# Altium PCB Backplane_PCB_v1.PcbDoc
Units mm, origin at the board's own origin, x right, y up, seen from the top; angles counter-clockwise.
Board outline 92.34 x 177.99 mm, 4 copper layers (Top Layer, Signal Layer 1, Internal Plane 1, Bottom Layer), stack 0.778 mm thick; 50 components, 42 nets, 291 pads, 43 vias.
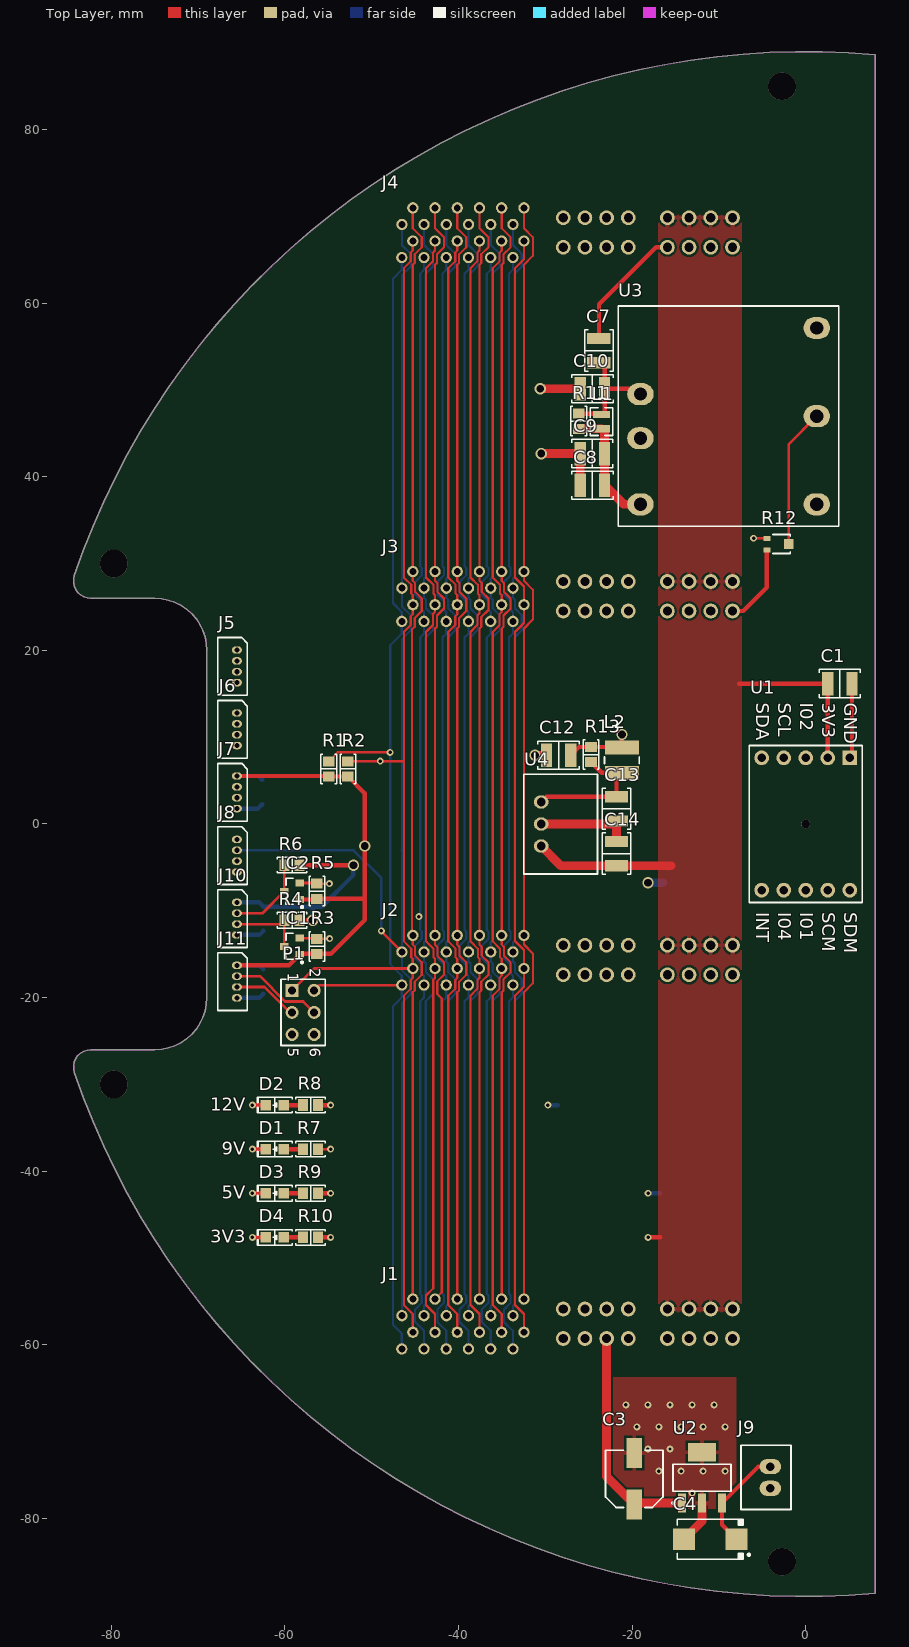
[diagram p0: Top Layer view]
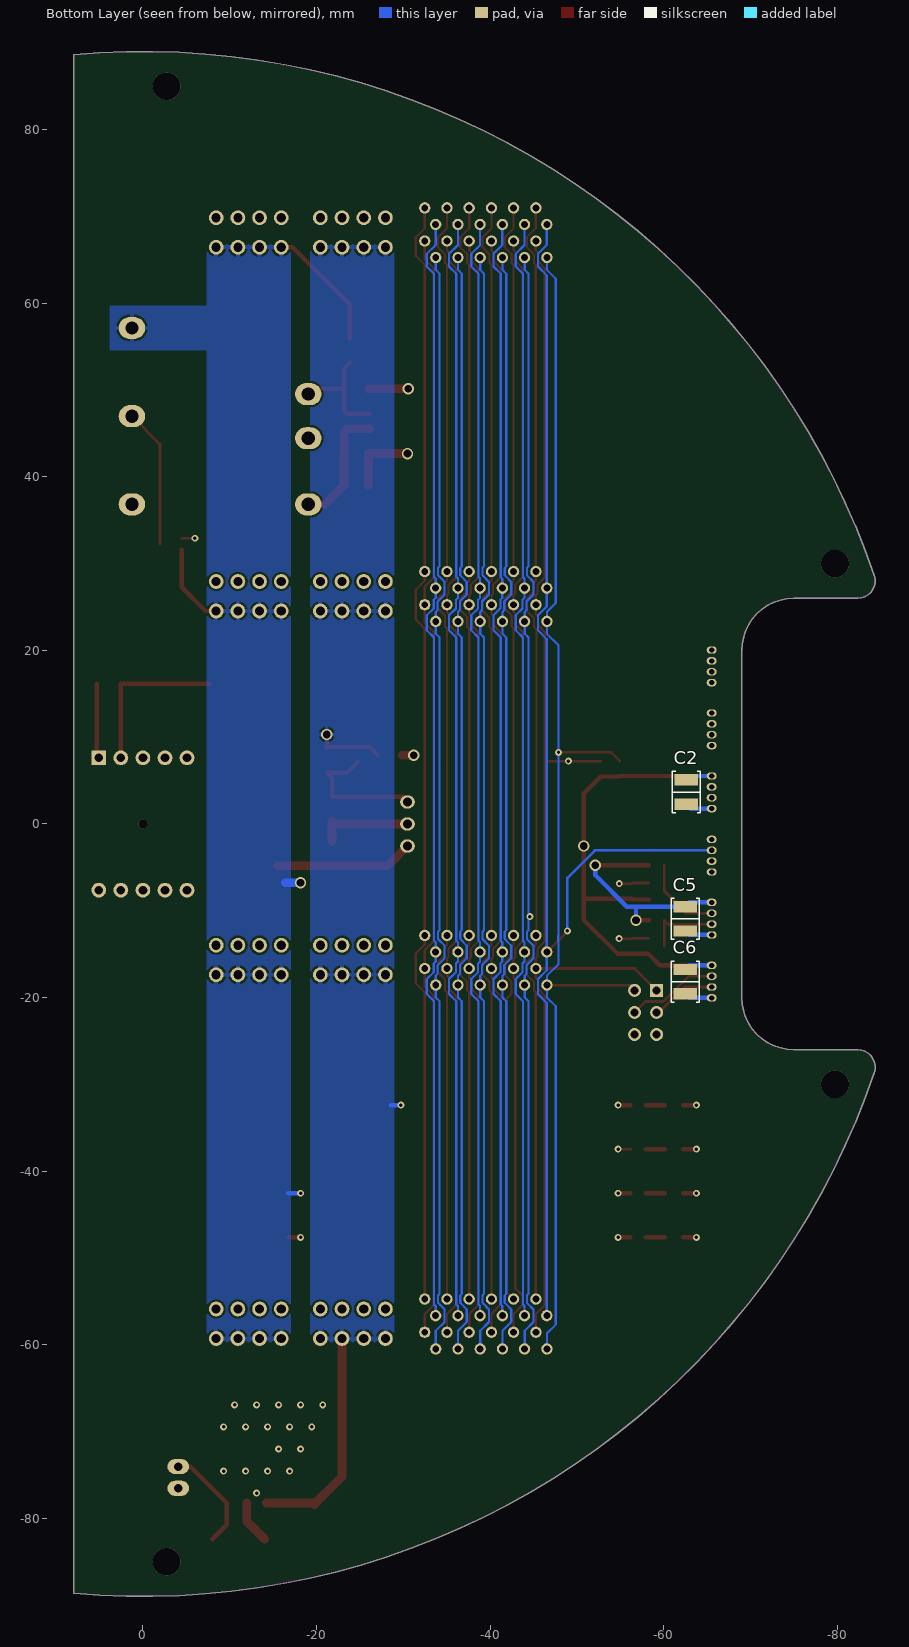
[diagram p1: Bottom Layer view, seen from below]
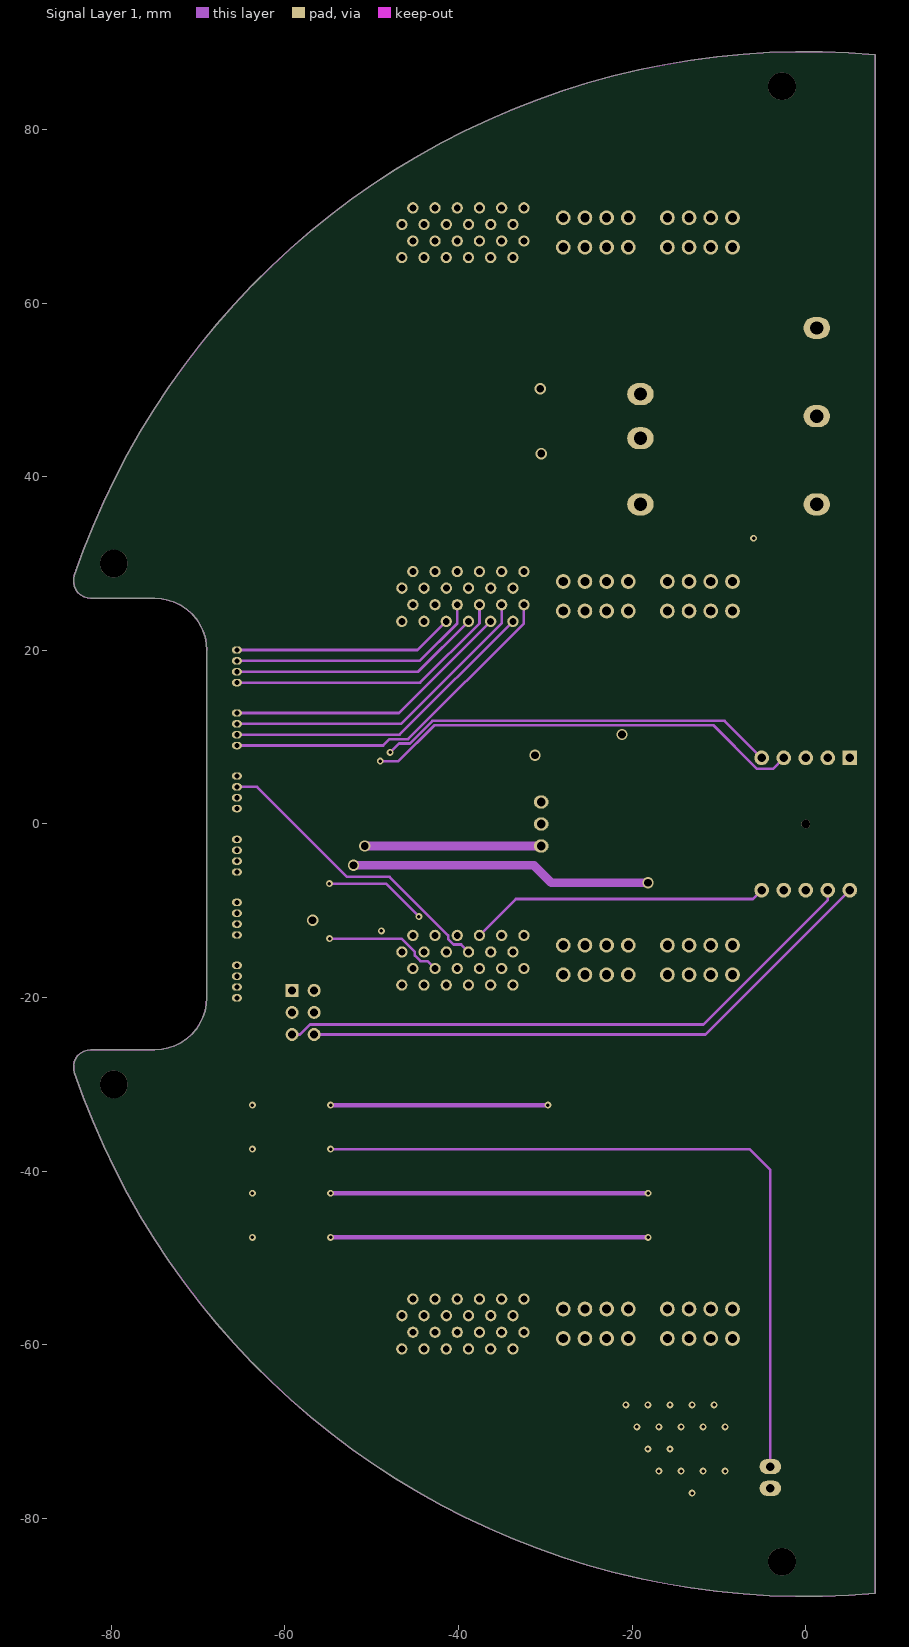
[diagram p2: Signal Layer 1]
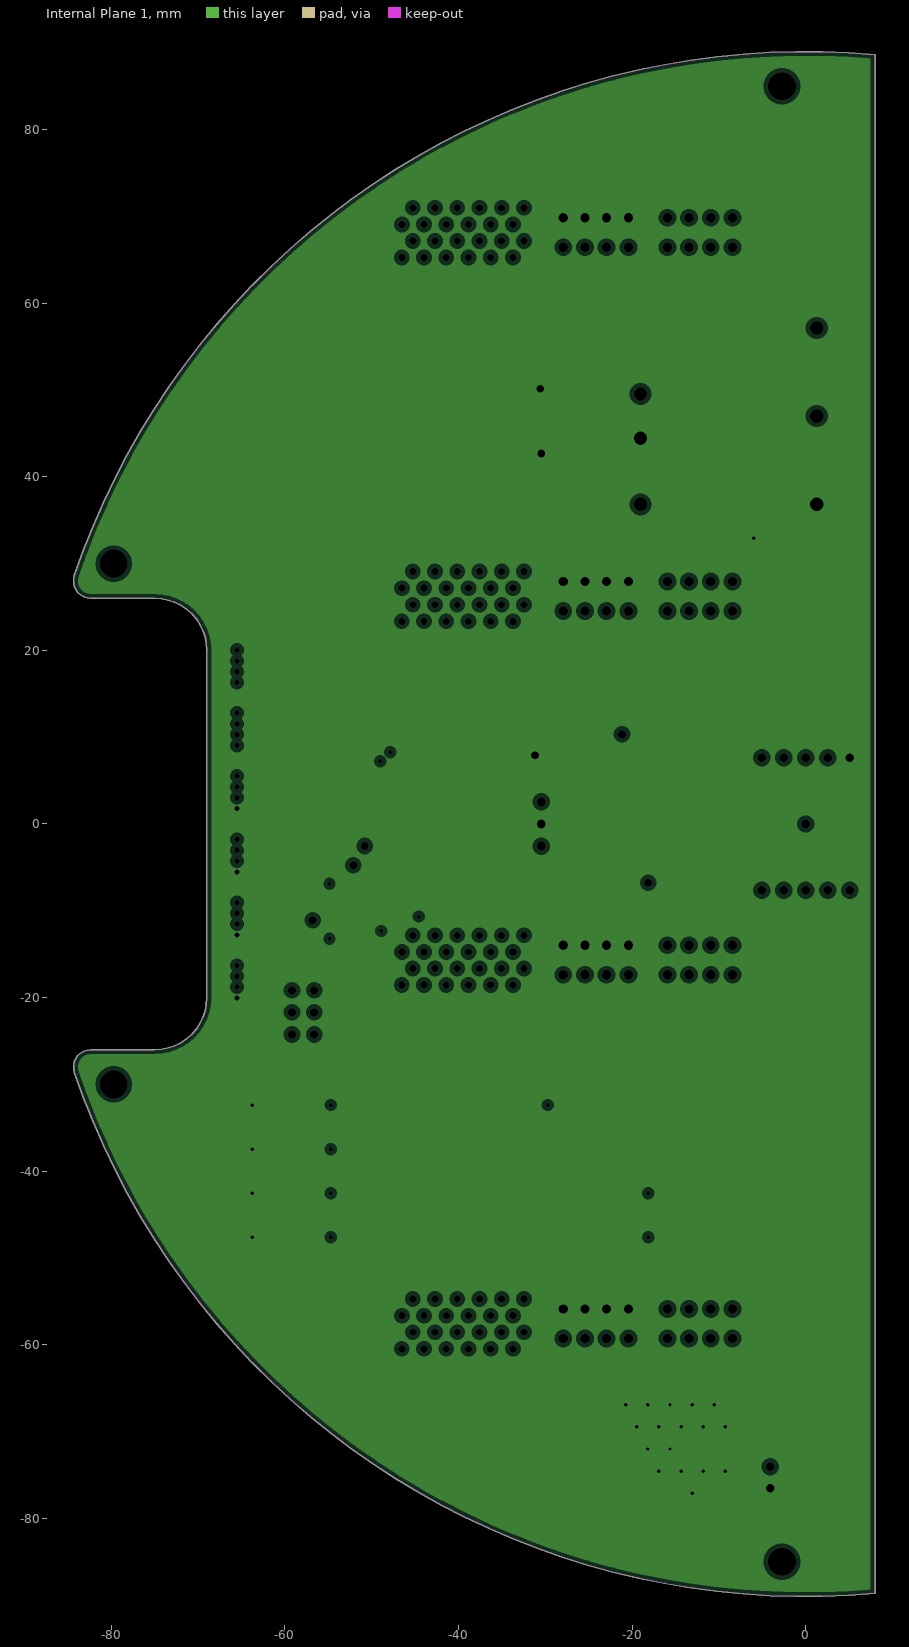
[diagram p3: Internal Plane 1, clearances drawn from the general rule]

## Layer stack, top to bottom
Top Solder: solder mask 0.0102, Solder Resist, Dk 3.5
Top Layer: signal copper 0.0356
Dielectric 1: core 0.254, FR-4, Dk 4.2
Signal Layer 1: signal copper 0.036
Dielectric 4: prepreg 0.127, Dk 4.2
Internal Plane 1: plane copper 0.036, net GND
Dielectric 3: core 0.254, Dk 4.2
Bottom Layer: signal copper 0.0356
Bottom Solder: solder mask 0.0102, Solder Resist, Dk 3.5

## Board outline
-84.256,28.644 -84.349,28.233 -84.354,27.812 -84.27,27.399 -84.102,27.013 -83.857,26.671 -83.545,26.387 -83.182,26.175 -82.781,26.044 -82.363,26 -74.992,26 -74.208,25.949 -73.439,25.796 -72.695,25.543 -71.992,25.196 -71.339,24.76 -70.749,24.243 -70.231,23.653 -69.795,23 -69.448,22.296 -69.196,21.553 -69.043,20.783 -68.992,20 -68.992,-20 -69.043,-20.783 -69.196,-21.553 -69.448,-22.296 -69.795,-23 -70.231,-23.653 -70.749,-24.243 -71.339,-24.76 -71.992,-25.196 -72.695,-25.543 -73.439,-25.796 -74.208,-25.949 -74.992,-26 -82.363,-26 -82.781,-26.044 -83.182,-26.175 -83.545,-26.387 -83.857,-26.671 -84.102,-27.013 -84.27,-27.399 -84.354,-27.812 -84.349,-28.233 -84.256,-28.644 -83.228,-31.506 -82.103,-34.332 -80.882,-37.118 -79.566,-39.86 -78.158,-42.556 -76.658,-45.202 -75.069,-47.796 -73.392,-50.333 -71.629,-52.812 -69.782,-55.229 -67.854,-57.581 -65.847,-59.867 -63.763,-62.082 -61.604,-64.225 -59.374,-66.293 -57.074,-68.283 -54.707,-70.194 -52.277,-72.023 -49.785,-73.767 -47.235,-75.426 -44.63,-76.996 -41.973,-78.476 -39.267,-79.865 -36.515,-81.16 -33.721,-82.361 -30.887,-83.465 -28.017,-84.472 -25.114,-85.381 -22.182,-86.189 -19.223,-86.897 -16.243,-87.504 -13.243,-88.008 -10.228,-88.409 -7.201,-88.707 -4.166,-88.902 -1.126,-88.993 1.916,-88.98 4.955,-88.862 7.989,-88.641 7.989,88.641 4.955,88.862 1.916,88.98 -1.126,88.993 -4.166,88.902 -7.201,88.707 -10.228,88.409 -13.243,88.008 -16.243,87.504 -19.223,86.897 -22.182,86.189 -25.114,85.381 -28.017,84.472 -30.887,83.465 -33.721,82.361 -36.515,81.16 -39.267,79.865 -41.973,78.476 -44.63,76.996 -47.235,75.426 -49.785,73.767 -52.277,72.023 -54.707,70.194 -57.074,68.283 -59.374,66.293 -61.604,64.225 -63.763,62.082 -65.847,59.867 -67.854,57.581 -69.782,55.229 -71.629,52.812 -73.392,50.333 -75.069,47.796 -76.658,45.202 -78.158,42.556 -79.566,39.86 -80.882,37.118 -82.103,34.332 -83.228,31.506

## Design rules (kind name [scope] priority, off if disabled: settings)
Clearance Clearance_Signal [All] p1: gap=0.254 ignorepadtopadclearanceinfootprint=FALSE except(0: Arc-Hole Track-Hole SMDPad-Hole THPad-Hole Via-Hole Fill-Hole Poly-Hole Region-Hole Text-Hole; 0.2: Arc-Arc Arc-Track Track-Track)
Clearance [All] p2: gap=0.254 ignorepadtopadclearanceinfootprint=FALSE except(0: Arc-Hole Track-Hole SMDPad-Hole THPad-Hole Via-Hole Fill-Hole Poly-Hole Region-Hole Text-Hole)
PlaneClearance [All] p1: clearance=0.508
PlaneConnect [All] p1: planeconnectstyle=Relief reliefexpansion=0.508 reliefentries=4 reliefconductorwidth=0.254 reliefairgap=0.254
PolygonConnect [All] p1: connectstyle=Relief reliefconductorwidth=0.508 reliefentries=4 polygonreliefangle="90 Angle" airgapwidth=0.254
RoutingVias RoutingVias_PWR [(InNet('3V3') OR InNet('5V') OR InNet('12V') OR InNet('GND'))] p1: holewidth=0.9 width=1.3 viastyle="Through Hole" minholewidth=0.4 minwidth=0.8 maxholewidth=1.4 maxwidth=2.1
RoutingVias RoutingVias_Signal [All] p2: holewidth=0.7 width=1.1 viastyle="Through Hole" minholewidth=0.4 minwidth=0.8 maxholewidth=1.3 maxwidth=1.8
SolderMaskExpansion [All] p1: expansion=0.102
Width Width_PWR [(InNet('3V3') OR InNet('5V') OR InNet('12V') OR InNet('GND'))] p1: maxlimit=1.016 minlimit=0.254 preferedwidth=0.508
Width [All] p2: maxlimit=0.508 minlimit=0.254 preferedwidth=0.305
28 further rules are at their usual default settings.

## Classes and differential pairs
component class "U_OPID[352] 3": C12 C13 C14 L2 R13 U4
component class "U_OPID[351] 5V Step-down regulator": C7 C8 C9 C10 L1 R11 R12 U3
component class Backplane: C1 C2 C3 C4 C5 C6 D1 D2 D3 D4 IC1 IC2 J1 J2 J3 J4 J5 J6 J7 J8 J9 J10 J11 P1 R1 R2 R3 R4 R5 R6 R7 R8 R9 R10 U1 U2

## Components (designator, comment, footprint, x,y, rotation, side; value= is the part's Value field where it differs from the comment)
C1 "10uF" "CAP 1210/3225 - 2.8MM" 3.934,16.178 r180 top
C2 "10uF" "CAP 1210/3225 - 2.8MM" -62.611,3.683 r90 bottom
C3 "22uF" "CAP ALUM 6.6MM" -19.757,-75.438 r90 top
C4 "22uF" "CAP POL 2917/7343" -11.002,-82.415 r180 top
C5 "10uF" "CAP 1210/3225 - 2.8MM" -62.484,-10.922 r90 bottom
C6 "10uF" "CAP 1210/3225 - 2.8MM" -62.484,-18.161 r90 bottom
C7 "1800 pF" CAP1210(3225) -23.823,54.541 r90 top
C8 "3.3uF" "CAP 1210/3225 - 2.0MM" -24.573,39.024 r0 top
C9 "3.3uF" "CAP 1210/3225 - 2.0MM" -24.592,42.678 r0 top
C10 "3.3uF" "CAP 1210/3225 - 2.0MM" -24.573,50.137 r0 top
C12 "10uF" "CAP 1210/3225 - 2.8MM" -28.475,7.919 r0 top
C13 "10uF" "CAP 1210/3225 - 2.8MM" -21.801,1.748 r90 top
C14 "10uF" "CAP 1210/3225 - 2.8MM" -21.801,-3.406 r270 top
D1 "White" "LED 0805/2012" -61.18,-37.465 r180 top value=Green
D2 "Red" "LED 0805/2012 RED" -61.18,-32.385 r180 top value=Green
D3 "Green" "LED 0805/2012 GREEN" -61.18,-42.545 r180 top
D4 "Yellow" "LED 0805/2012 YELLOW" -61.18,-47.625 r180 top value=Green
IC1 "BSS138NH6327XTSA2" "INFINEON SOT-23-3" -59.182,-14.097 r180 top
IC2 "BSS138NH6327XTSA2" "INFINEON SOT-23-3" -59.178,-7.747 r180 top
J1 "0461144241" LPH_VERT.RECEPT._ASSY_4PX24S -46.54,-60.47 r180 top
J2 "0461144241" LPH_VERT.RECEPT._ASSY_4PX24S -46.54,-18.56 r180 top
J3 "0461144241" LPH_VERT.RECEPT._ASSY_4PX24S -46.54,23.35 r180 top
J4 "0461144241" LPH_VERT.RECEPT._ASSY_4PX24S -46.54,65.26 r180 top
J5 "DF13-4P-1.25DSA" HDRV4W35P125_1X4_665X340X430P -65.532,20.041 r270 top
J6 "DF13-4P-1.25DSA" HDRV4W35P125_1X4_665X340X430P -65.532,12.787 r270 top
J7 "DF13-4P-1.25DSA" HDRV4W35P125_1X4_665X340X430P -65.532,5.528 r270 top
J8 "DF13-4P-1.25DSA" HDRV4W35P125_1X4_665X340X430P -65.532,-1.778 r270 top
J9 "B2B-XH-A(LF)(SN)" "JST XH B2B-XH-A" -4.073,-75.286 r270 top
J10 "DF13-4P-1.25DSA" HDRV4W35P125_1X4_665X340X430P -65.532,-9.032 r270 top
J11 "DF13-4P-1.25DSA" HDRV4W35P125_1X4_665X340X430P -65.532,-16.286 r270 top
L1 "1uH" "TDK VLS252012CX" -23.523,46.358 r90 top
L2 "VLCF4028T-330MR61-2" "TDK VLCF4028-2" -21.176,7.353 r270 top value=33uH
P1 "I2C Jumper" HDR2X3 -59.182,-19.169 r270 top
R1 "100k" "RES 0805/2012" -54.955,6.35 r270 top
R2 "100k" "RES 0805/2012" -52.75,6.35 r270 top
R3 "10k" "RES 0805/2012" -56.328,-14.097 r90 top
R4 "10k" "RES 0805/2012" -59.182,-11.093 r180 top
R5 "10k" "RES 0805/2012" -56.324,-7.747 r90 top
R6 "10k" "RES 0805/2012" -59.182,-4.743 r180 top
R7 "1.2k" "RES 0805/2012" -57.044,-37.465 r0 top
R8 "2.2k" "RES 0805/2012" -57.044,-32.385 r0 top
R9 "620" "RES 0805/2012" -57.044,-42.545 r0 top
R10 "240" "RES 0805/2012" -57.044,-47.625 r0 top
R11 "0.0" "RES 0805/2012" -26.153,46.408 r90 top
R12 "200k" "POT PANASONIC EVM2W" -3.175,32.257 r270 top
R13 "0.0" "RES 0805/2012" -24.73,7.994 r270 top
U1 "Ultimate Sensor Fusion Solution" "Ultimate Sensor Fusion Solution" 0,0 r270 top
U2 "LM2940IMP-9.0/NOPB" SOT230P700X180-4N -11.952,-75.311 r90 top
U3 "#NAME?" JSM2512S05 -8.89,46.99 r270 top
U4 "#NAME?" R-78Exx-1.0 -30.48,2.54 r270 top

## Footprints (in the part's own frame and the unit in brackets; to place one, negate y for a bottom-side part, rotate by r counter-clockwise, add the part's x,y. Pads: shape width x height; smd on the part's side, far side on the other; paste and mask are expansions set on the pad)
CAP1210(3225) [mm] "Chip Capacitor, 2-Leads, Body 3.20x2.50mm, IPC Medium Density"
  rect 1.3x2.7 smd: 1(-1.4,0) 2(1.4,0)
  silkscreen extent -2.38,-1.62 2.37,1.62, body extent -1.6,-1.25 1.6,1.25, height 1.8
"CAP 1210/3225 - 2.0MM" [mm] "Chip Capacitor, 2-Leads, Body 3.20x2.50mm, IPC Medium Density"
  rect 1.3x2.7 smd: 1(-1.4,0) 2(1.4,0)
  silkscreen extent -2.38,-1.63 2.37,1.63, body extent -1.6,-1.25 1.6,1.25, height 2
"CAP 1210/3225 - 2.8MM" [mm] "Chip Capacitor, 2-Leads, Body 3.20x2.50mm, IPC Medium Density"
  rect 1.3x2.7 smd: 1(-1.4,0) 2(1.4,0)
  silkscreen extent -2.38,-1.62 2.38,1.62, body extent -1.6,-1.25 1.6,1.25, height 2.8
"CAP ALUM 6.6MM" [mm] "Aluminum Electrolytic Capacitor, Body 6.60x6.60x7.70mm, IPC Low Density"
  rect 3.45x1.8 smd: 1(-2.95,0) 2(2.95,0)
  silkscreen extent -3.3,-3.3 3.3,3.3, body extent -3.5,-3.3 3.5,3.3, height 7.7
"CAP POL 2917/7343" [mm] "Molded Capacitor, 2-Leads, Body 7.30x4.30mm, IPC Medium Density"
  rect 2.55x2.45 smd: 1(-3.025,0) 2(3.025,0)
  silkscreen extent -4.58,-2.3 3.8,2.3, body extent -3.65,-2.15 3.65,2.15, height 4.1
HDR2X3 [mm] "Connector; Header; 3x2 Position"
  rect 1.5x1.5 hole 0.9: 1(0,0)
  round 1.5 hole 0.9: 2(0,2.54) 3(2.54,0) 4(2.54,2.54) 5(5.08,0) 6(5.08,2.54)
  silkscreen extent -1.27,-1.27 6.35,3.81
HDRV4W35P125_1X4_665X340X430P [mm]
  oval 0.85x1.15 hole 0.6 unplated: 1(0,0) 2(1.25,0) 3(2.5,0) 4(3.75,0)
  silkscreen extent -1.45,-2.2 5.2,1.2, body extent -1.45,-2.2 5.2,1.2, height 4.3
"INFINEON SOT-23-3" [mm] "SOT23, 3-Leads, Body 2.90x2.40mm, Pitch 0.95mm, IPC Medium Density"
  rect 0.972x0.802 smd: 1(-0.885,0.95) 2(0.885,0) 3(-0.885,-0.95)
  silkscreen extent -1.28,-1.5 0.7,1.95, body extent -1.16,-1.45 1.16,1.45, height 1
JSM2512S05 [mil]
  oval 100x120 hole 60: 1(-100,-400) 2(100,-400) 3(-400,400) 4(0,400) 5(400,400) 6(400,-400)
  silkscreen extent -500,-500 500,500, body extent -500,-500 500,500, height 400
"JST XH B2B-XH-A" [mm]
  oval 1.75x2.5 hole 1: 1(-1.25,0) 2(1.25,0)
  silkscreen extent -3.7,-3.38 3.7,2.38, body extent -3.7,-3.38 3.7,2.38, height 7
"LED 0805/2012" [mm] "Chip Diode, 2-Leads, Body 2.00x1.25mm, IPC Medium Density"
  rect 1.2x1.2 smd: 1(-1.05,0) 2(1.05,0)
  silkscreen extent -2.03,-0.9 2.03,0.9, body extent -1,-0.62 1,0.63, height 0.9
"LED 0805/2012 GREEN" [mm] "Chip Diode, 2-Leads, Body 2.00x1.25mm, IPC Medium Density"
  rect 1.2x1.2 smd: 1(-1.05,0) 2(1.05,0)
  silkscreen extent -2.03,-0.9 2.03,0.9, body extent -1,-0.62 1,0.63, height 0.9
"LED 0805/2012 RED" [mm] "Chip Diode, 2-Leads, Body 2.00x1.25mm, IPC Medium Density"
  rect 1.2x1.2 smd: 1(-1.05,0) 2(1.05,0)
  silkscreen extent -2.03,-0.9 2.03,0.9, body extent -1,-0.62 1,0.63, height 0.9
"LED 0805/2012 YELLOW" [mm] "Chip Diode, 2-Leads, Body 2.00x1.25mm, IPC Medium Density"
  rect 1.2x1.2 smd: 1(-1.05,0) 2(1.05,0)
  silkscreen extent -2.03,-0.9 2.03,0.9, body extent -1,-0.62 1,0.63, height 0.9
LPH_VERT.RECEPT._ASSY_4PX24S [mm]
  round 1.3 hole 0.8 unplated: 1(0,0) 2(-1.27,-1.91) 3(-2.56,0) 4(-3.83,-1.91) 5(-5.12,0) 6(-6.39,-1.91) 7(-7.68,0) 8(-8.95,-1.91) 9(-10.24,0) 10(-11.51,-1.91) 11(-12.8,0) 12(-14.07,-1.91) 13(-0.01,-3.82) 14(-1.27,-5.73) 15(-2.57,-3.82) 16(-3.83,-5.73) 17(-5.13,-3.82) 18(-6.39,-5.73) 19(-7.69,-3.82) 20(-8.95,-5.73) 21(-10.25,-3.82) 22(-11.51,-5.73) 23(-12.81,-3.82) 24(-14.07,-5.73)
  round 1.7 hole 1.05 unplated: P1A(-26.1,-1.19) P1A(-23.6,-1.19) P1A(-21.1,-1.19) P1A(-18.6,-1.19) P1B(-26.1,-4.59) P1B(-23.6,-4.59) P1B(-21.1,-4.59) P1B(-18.6,-4.59) P2A(-38.1,-1.19) P2A(-35.6,-1.19) P2A(-33.1,-1.19) P2A(-30.6,-1.19) P2B(-38.1,-4.59) P2B(-35.6,-4.59) P2B(-33.1,-4.59) P2B(-30.6,-4.59)
  body extent -40.54,-7.03 2.42,1.3, height 15.22
"POT PANASONIC EVM2W" [mm] "Panasonic EVM2W 2.75mm x 2.20mm x 1.05mm"
  rect 0.575x0.8 smd: 1(-0.663,-1.3) 3(0.662,-1.3)
  rect 1.2x1.1 smd: 2(0,1.2)
  silkscreen extent -1.1,-0.6 1.1,1.4, body extent -1.1,-1.3 1.1,1.45, height 0.81
R-78Exx-1.0 [mm]
  oval 1.5x1.7 hole 1: 1(0,0) 2(2.54,0) 3(5.08,0)
  silkscreen extent -3.2,-2 8.3,6.5, body extent -3.3,-1.95 8.3,6.55, height 10.4
"RES 0805/2012" [mm] "Chip Resistor, 2-Leads, Body 2.00x1.25mm, IPC Medium Density"
  rect 1.15x1.35 smd: 1(-0.875,0) 2(0.875,0)
  silkscreen extent -1.7,-0.9 1.7,0.9, body extent -0.95,-0.62 1.05,0.63, height 0.6
SOT230P700X180-4N [mm] "SOT223, 4-Leads, Body 6,50x7,00mm (avg), Pitch 2,30mm, IPC Medium Density"
  rect 2.15x0.9 smd: 1(-2.925,2.3) 2(-2.925,0) 3(-2.925,-2.3)
  rect 2.15x3.2 smd: 4(2.925,0)
  silkscreen extent -3.05,-3.35 1.55,3.42, body extent -3.5,-3.35 3.5,3.35, height 1.8
"TDK VLCF4028-2" [mm] "Precision Wire Wound Inductor, 2-Leads, Body 4.00x4.00mm, IPC Medium Density"
  rect 1.6x3.9 smd: 1(-1.45,0) 2(1.45,0)
  silkscreen extent -0.4,-2 0.4,2, body extent -2.05,-2 2.05,2, height 2.81
"TDK VLS252012CX" [mm] "Inductor, 2-Leads, Body 2.50x2.00mm, IPC Medium Density"
  rect 0.85x2 smd: 1(-0.825,0) 2(0.825,0)
  silkscreen extent -1.6,-1.3 1.6,1.3, body extent -1.25,-1 1.25,1, height 1.2
"Ultimate Sensor Fusion Solution" [mm]
  rect 1.7x1.7 hole 1: 1(-7.62,5.08)
  round 1.7 hole 1: 2(-7.62,2.54) 3(-7.62,0) 4(-7.62,-2.54) 5(-7.62,-5.08) 6(7.62,-5.08) 7(7.62,-2.54) 8(7.62,0) 9(7.62,2.54) 10(7.62,5.08)
  silkscreen extent -9.05,-6.5 9.05,6.5, body extent -8.89,-6.35 8.89,6.35, height 8.52

## Part data
C1 C2 C5 C6 C12 C13 C14: library part C3225X7S1H106M250AB, "CAP CER 10UF 50V X7S 1210", Device Package="1210 (3225 Metric)", Manufacturer="TDK Corporation", Supplier Part Number 1=445-4537-2-ND, TemperatureCoefficient=X7S, TemperatureRange="-55C ~ 125C", Tolerance=20%, Voltage=50V, ComponentLink1Description=Datasheet, ComponentLink1URL=https://product.tdk.com/info/en/catalog/datasheets/mlcc_commercial_general_en.pdf, ComponentLink2Description="Digi-Key Listing", ComponentLink2URL=https://www.digikey.com/product-detail/en/tdk-corporation/C3225X7S1H106M250AB/445-4537-2-ND/2042208, PartId=19089, Part Number=C3225X7S1H106M250AB, Price=0,3578, Supplier 1=Digi-Key
C3: library part UWJ1V220MCL1GB, "CAP ALUM 22UF 20% 35V SMD", Device Package="Radial, Can - SMD", Lifetime @ Temp="2000 Hrs @ 85C", Manufacturer=Nichicon, Ripple Current=45mA, Supplier Part Number 1=493-9805-2-ND, TemperatureRange="-40C ~ 85C", Tolerance=20%, Voltage=35V, ComponentLink1Description=Datasheet, ComponentLink1URL=http://nichicon-us.com/english/products/pdfs/e-wj.pdf, ComponentLink2Description="Digi-Key listing", ComponentLink2URL=http://digikey.com/product-detail/en/UWJ1V220MCL1GB/493-9805-2-ND/2550774, Impedance=-, PartId=7192, Part Number=UWJ1V220MCL1GB, Price=0,1009, Supplier 1=Digi-Key, Type="General Purpose"
C4: library part 293D226X0020D2TE3, "CAP TANT 22UF 20V 20% 2917", Device Package="2917 (7343 Metric)", Manufacturer="Vishay Sprague", Supplier Part Number 1=718-1063-2-ND, TemperatureRange="-55C ~ 125C", Tolerance=20%, Voltage=20V, ComponentLink1Description=Datasheet, ComponentLink1URL=http://www.vishay.com/docs/40002/293d.pdf, ComponentLink2Description="Digi-Key listing", ComponentLink2URL=http://digikey.com/product-detail/en/293D226X0020D2TE3/718-1063-2-ND/1559415, PartId=6865, Part Number=293D226X0020D2TE3, Price=0,3306, Supplier 1=Digi-Key, Type="General Purpose"
C7: library part C1210C182JGRACTU, Supplier Part Number 1=399-4821-1-ND, Tolerance="± 5%", Voltage Rating="2 kV", ComponentLink1Description="Manufacturer Link", ComponentLink1URL=http://www.kemet.com/, ComponentLink2Description=Datasheet, ComponentLink2URL=https://content.kemet.com/datasheets/KEM_C1010_X7R_HV_SMD.pdf, Part Number=C1210C182JGRACTU, Supplier 1=Digi-Key
C8 C9 C10: library part C1210C335K3NACTU, "CAP CER 3.3UF 25V X8L 1210", Device Package="1210 (3225 Metric)", Manufacturer=Kemet, Supplier Part Number 1=399-5739-2-ND, TemperatureCoefficient=X8L, TemperatureRange="-55C ~ 150C", Tolerance=10%, Voltage=25V, ComponentLink1Description=Datasheet, ComponentLink1URL=http://www.kemet.com/Lists/ProductCatalog/Attachments/71/KEM_C1008_X8L_150C_SMD.pdf, ComponentLink2Description="Digi-Key Listing", ComponentLink2URL=https://www.digikey.com/product-detail/en/kemet/C1210C335K3NACTU/399-5739-2-ND/2209335, PartId=18606, Part Number=C1210C335K3NACTU, Price=0,2645, Supplier 1=Digi-Key
D1: library part VAOL-S8WR4, "LED WHITE DIFFUSED 0805 SMD", Current (Test)=5mA, Device Package="0805 (2012 Metric)", Manufacturer="Visual Communications Company - VCC", Supplier Part Number 1=VAOL-S8WR4TR-ND, Voltage Forward=3V, Colour=White, ComponentLink1Description=Datasheet, ComponentLink1URL=http://vcclite.com/_pdf/VAOL-S8WR4-LED-0805-white.pdf, ComponentLink2Description="Digi-Key Listing", ComponentLink2URL=http://www.digikey.ca/product-detail/en/VAOL-S8WR4/VAOL-S8WR4TR-ND/4515729, Lens Transparency=Diffused, Millicandela=50mcd, PartId=7086, Part Number=VAOL-S8WR4, Price=0,2614, Supplier 1=Digi-Key, Type="Surface Mount", Viewing Angle=150
D2: library part "LH R974-LP-1", "LED RED DIFFUSED 0805 SMD", Current (Test)=20mA, Device Package="0805 (2012 Metric)", Manufacturer="OSRAM Opto Semiconductors Inc.", Supplier Part Number 1=475-1415-2-ND, Voltage Forward=1.8V, Colour=Red, ComponentLink1Description=Datasheet, ComponentLink1URL=http://www.osram-os.com/Graphics/XPic8/00078869_0.pdf, ComponentLink2Description="Digi-Key Listing", ComponentLink2URL=http://www.digikey.ca/product-detail/en/LH%20R974-LP-1/475-1415-2-ND/1227932, Lens Transparency=Diffused, Millicandela=41mcd, PartId=7077, Part Number="LH R974-LP-1", Price=0,0621, Supplier 1=Digi-Key, Type="Surface Mount", Viewing Angle=160
D3: library part "LG R971-KN-1", "LED GREEN DIFFUSED 0805 SMD", Current (Test)=20mA, Device Package="0805 (2012 Metric)", Manufacturer="OSRAM Opto Semiconductors Inc.", Supplier Part Number 1=475-1410-2-ND, Voltage Forward=2.2V, Colour=Green, ComponentLink1Description=Datasheet, ComponentLink1URL=http://www.osram-os.com/Graphics/XPic9/00078860_0.pdf, ComponentLink2Description="Digi-Key Listing", ComponentLink2URL=http://www.digikey.ca/product-detail/en/LG%20R971-KN-1/475-1410-2-ND/1227925, Lens Transparency=Diffused, Millicandela=26.05mcd, PartId=7076, Part Number="LG R971-KN-1", Price=0,0621, Supplier 1=Digi-Key, Type="Surface Mount", Viewing Angle=160
D4: library part "LY R976-PS-36", "LED YELLOW DIFFUSED 0805 SMD", Current (Test)=20mA, Device Package="0805 (2012 Metric)", Manufacturer="OSRAM Opto Semiconductors Inc.", Supplier Part Number 1=475-2560-2-ND, Voltage Forward=2V, Colour=Yellow, ComponentLink1Description=Datasheet, ComponentLink1URL=http://www.osram-os.com/Graphics/XPic9/00078941_0.pdf, ComponentLink2Description="Digi-Key Listing", ComponentLink2URL=http://www.digikey.ca/product-detail/en/LY%20R976-PS-36/475-2560-2-ND/1228052, Lens Transparency=Diffused, Millicandela=162.5mcd, PartId=7082, Part Number="LY R976-PS-36", Price=0,0654, Supplier 1=Digi-Key, Type="Surface Mount", Viewing Angle=160
IC1 IC2: "MOSFET N-CH 60V 230MA SOT-23", Current Continuous Drain="230mA (Ta)", Device Package="TO-236-3, SC-59, SOT-23-3", Drain to Source Voltage (Vdss)=60V, Input Capacitance (Ciss) at Vds="41pF @ 25V", Manufacturer="Infineon Technologies", Supplier Part Number 1=BSS138NH6327XTSA2CT-ND, ComponentLink1Description=Datasheet, ComponentLink1URL=http://www.infineon.com/dgdl/Infineon-BSS138N-DS-v02_86-en.pdf?fileId=db3a304330f68606013104d944d53efb, ComponentLink2Description="Digi-Key Listing", ComponentLink2URL=https://www.digikey.com/product-detail/en/infineon-technologies/BSS138NH6327XTSA2/BSS138NH6327XTSA2CT-ND/5413728, Gate Charge (Qg)="1.4nC @ 10V", PartId=29472, Part Number=BSS138NH6327XTSA2, Price=0,34, Rds On (Max) at Id, Vgs="3.5 Ohm @ 230mA, 10V", Supplier 1=Digi-Key, Type=N-Channel, Vgs(th) (Max) at Id=20V
J1 J2 J3 J4: Supplier Part Number 1=WM9739-ND, ComponentLink1Description="Manufacturer Link", ComponentLink1URL=http://www.molex.com/, ComponentLink2Description=Datasheet, ComponentLink2URL=http://www.molex.com/pdm_docs/sd/461144241_sd.pdf, Mounting Type="Through Hole", Number Of Positions=28, Number Of Rows=2, Part Number=0461144241, Supplier 1=Digi-Key
J5 J6 J7 J8 J10 J11: Supplier Part Number 1=H2193-ND, ComponentLink1Description="Manufacturer Link", ComponentLink1URL=https://www.hirose.com/, ComponentLink2Description=Datasheet, ComponentLink2URL=https://www.hirose.com/product/en/download_file/key_name/DF13/category/Catalog/doc_file_id/31687/?file_category_id=4&item_id=38&is_series=1, Mounting Type="Through Hole", Number Of Positions=4, Number Of Rows=1, Part Number=DF13-4P-1.25DSA, Supplier 1=Digi-Key
J9: "CONN HEADER XH TOP 2POS 2.5MM", Colour=Natural, Manufacturer="JST Sales America Inc.", Supplier Part Number 1=455-2247-ND, ComponentLink1Description=Datasheet, ComponentLink1URL=http://www.jst-mfg.com/product/pdf/eng/eXH.pdf, ComponentLink2Description="Digi-Key Listing", ComponentLink2URL=http://www.digikey.com/product-detail/en/jst-sales-america-inc/B2B-XH-A(LF)(SN)/455-2247-ND/1651045, Contact Finish=Tin, Fastening Type="Detent Lock", Number Of Positions=2, Number Of Rows=1, PartId=16449, Part Number=B2B-XH-A(LF)(SN), Pitch="0.098\" (2.50mm)", Price=0,15, Series=XH, Supplier 1=Digi-Key, Type="Header, Shrouded"
L1: library part VLS252012CX-1R0M, "FIXED IND 1UH 2.55A 62 MOHM SMD", Current Rating=2.55A, DC Resistance (DCR)="62 mOhm Max", Device Package=Nonstandard, Frequency - Self Resonant=-, Manufacturer="TDK Corporation", Operating Temperature="-40C ~ 105C", Supplier Part Number 1=445-172980-2-ND, Tolerance=20%, ComponentLink1Description=Datasheet, ComponentLink1URL=https://product.tdk.com/info/en/catalog/datasheets/inductor_commercial_power_vls252012cx_en.pdf, ComponentLink2Description="Digi-Key Listing", ComponentLink2URL=https://www.digikey.com/product-detail/en/VLS252012CX-1R0M/445-172980-2-ND/5169785, Inductance=1uH, PartId=9505, Part Number=VLS252012CX-1R0M, Price=0,1785, Q @ Freq=-, Series=VLS-CX, Shielding=Shielded, Supplier 1=Digi-Key, Type=Wirewound
L2: "FIXED IND 33UH 610MA 350 MOHM", Current - Saturation=610mA, DC Resistance (DCR)="350 mOhm Max", Device Package=Nonstandard, Inductance=33uH, Manufacturer="TDK Corporation", Operating Temperature="-40C ~ 105C", Supplier Part Number 1=445-6549-2-ND, Tolerance=20%, ComponentLink1Description=Datasheet, ComponentLink1URL=https://product.tdk.com/info/en/catalog/datasheets/inductor_commercial_power_vlcf4028-2_en.pdf, ComponentLink2Description="Digi-Key Listing", ComponentLink2URL=https://www.digikey.com/product-detail/en/tdk-corporation/VLCF4028T-330MR61-2/445-6549-2-ND/2465306, Current Rating=610mA, Material - Core=Ferrite, PartId=16423, Part Number=VLCF4028T-330MR61-2, Price=0,441, Series=VLCF, Shielding=Shielded, Supplier 1=Digi-Key, Type=Wirewound
P1: library part "Header 3X2", "Header, 3-Pin, Dual row", LatestRevisionDate=17-Jul-2002, LatestRevisionNote="Re-released for DXP Platform.", Publisher="Altium Limited"
R1 R2: library part ERJ-6ENF1003V, "RES SMD 100K OHM 1% 1/8W 0805", Device Package="0805 (2012 Metric)", Manufacturer="Panasonic Electronic Components", PowerRating="0.125W, 1/8W", Supplier Part Number 1=P100KCTR-ND, TemperatureCoefficient=100ppm/C, TemperatureRange="-55C ~ 155C", Tolerance=1%, ComponentLink1Description=Datasheet, ComponentLink1URL=http://industrial.panasonic.com/www-cgi/jvcr13pz.cgi?E+PZ+3+AOA0002+ERJ6ENF1003V+7+WW, ComponentLink2Description="Digi-Key listing", ComponentLink2URL=http://digikey.com/product-detail/en/ERJ-6ENF1003V/P100KCTR-ND/111841, PartId=1950, Part Number=ERJ-6ENF1003V, Price=0,0073, Supplier 1=Digi-Key, Type="Thick Film"
R3 R4 R5 R6: library part ERJ-6ENF1002V, "RES SMD 10K OHM 1% 1/8W 0805", Device Package="0805 (2012 Metric)", Manufacturer="Panasonic Electronic Components", PowerRating="0.125W, 1/8W", Supplier Part Number 1=P10.0KCTR-ND, TemperatureCoefficient=100ppm/C, TemperatureRange="-55C ~ 155C", Tolerance=1%, ComponentLink1Description=Datasheet, ComponentLink1URL=http://industrial.panasonic.com/www-cgi/jvcr13pz.cgi?E+PZ+3+AOA0002+ERJ6ENF1002V+7+WW, ComponentLink2Description="Digi-Key listing", ComponentLink2URL=http://digikey.com/product-detail/en/ERJ-6ENF1002V/P10.0KCTR-ND/111474, PartId=1947, Part Number=ERJ-6ENF1002V, Price=0,0073, Supplier 1=Digi-Key, Type="Thick Film"
R7: library part ERJ-6GEYJ122V, "RES SMD 1.2K OHM 5% 1/8W 0805", Device Package="0805 (2012 Metric)", Manufacturer="Panasonic Electronic Components", PowerRating="0.125W, 1/8W", Supplier Part Number 1=P1.2KATR-ND, TemperatureCoefficient=200ppm/C, TemperatureRange="-55C ~ 155C", Tolerance=5%, ComponentLink1Description=Datasheet, ComponentLink1URL=http://industrial.panasonic.com/www-cgi/jvcr13pz.cgi?E+PZ+3+AOA0001+ERJ6GEYJ122V+7+WW, ComponentLink2Description="Digi-Key Listing", ComponentLink2URL=https://www.digikey.com/product-detail/en/panasonic-electronic-components/ERJ-6GEYJ122V/P1.2KATR-ND/83018, PartId=11466, Part Number=ERJ-6GEYJ122V, Price=0,0032, Supplier 1=Digi-Key
R8: library part ERA-6AEB222V, "RES SMD 2.2K OHM 0.1% 1/8W 0805", Device Package="0805 (2012 Metric)", Manufacturer="Panasonic Electronic Components", PowerRating="0.125W, 1/8W", Supplier Part Number 1=P2.2KDATR-ND, TemperatureCoefficient=25ppm/C, TemperatureRange="-55C ~ 155C", Tolerance=0.1%, ComponentLink1Description=Datasheet, ComponentLink1URL=http://industrial.panasonic.com/lecs/www-data/pdf/AOA0000/AOA0000CE26.pdf, ComponentLink2Description="Digi-Key listing", ComponentLink2URL=http://digikey.com/product-detail/en/ERA-6AEB222V/P2.2KDATR-ND/1465757, PartId=2443, Part Number=ERA-6AEB222V, Price=0,055, Supplier 1=Digi-Key, Type="Thin Film"
R9: library part ERJ-6ENF6200V, "RES SMD 620 OHM 1% 1/8W 0805", Device Package="0805 (2012 Metric)", Manufacturer="Panasonic Electronic Components", PowerRating="0.125W, 1/8W", Supplier Part Number 1=P620CTR-ND, TemperatureCoefficient=100ppm/C, TemperatureRange="-55C ~ 155C", Tolerance=1%, ComponentLink1Description=Datasheet, ComponentLink1URL=http://industrial.panasonic.com/www-cgi/jvcr13pz.cgi?E+PZ+3+AOA0002+ERJ6ENF6200V+7+WW, ComponentLink2Description="Digi-Key listing", ComponentLink2URL=http://digikey.com/product-detail/en/ERJ-6ENF6200V/P620CTR-ND/1746521, PartId=2394, Part Number=ERJ-6ENF6200V, Price=0,0073, Supplier 1=Digi-Key, Type="Thick Film"
R10: library part ERJ-P06J241V, "RES SMD 240 OHM 5% 1/2W 0805", Device Package="0805 (2012 Metric)", Manufacturer="Panasonic Electronic Components", PowerRating="0.5W, 1/2W", Supplier Part Number 1=P240ADTR-ND, TemperatureCoefficient=200ppm/C, TemperatureRange="-55C ~ 155C", Tolerance=5%, ComponentLink1Description=Datasheet, ComponentLink1URL=//media.digikey.com/pdf/Data%20Sheets/Panasonic%20Electronic%20Components/ERJ_PA2_P03_PA3_P06_P08_P14.pdf, ComponentLink2Description="Digi-Key Listing", ComponentLink2URL=https://www.digikey.com/product-detail/en/panasonic-electronic-components/ERJ-P06J241V/P240ADTR-ND/525242, PartId=11577, Part Number=ERJ-P06J241V, Price=0,0129, Supplier 1=Digi-Key
R11 R13: library part 5106, "RES SMD 0.0 OHM JUMPER 1/2W 0805", Device Package="0805 (2012 Metric)", Manufacturer="Keystone Electronics", PowerRating="0.5W, 1/2W", Supplier Part Number 1=36-5106TR-ND, Tolerance=Jumper, ComponentLink1Description=Datasheet, ComponentLink1URL=http://www.keyelco.com/product-pdf.cfm?p=14039, ComponentLink2Description="Digi-Key Listing", ComponentLink2URL=https://www.digikey.com/product-detail/en/keystone-electronics/5106/36-5106TR-ND/5118868, PartId=16148, Part Number=5106, Price=0,2505, Supplier 1=Digi-Key
R12: library part EVM-2WSX80B25, "TRIMMER 200K OHM 0.15W SMD", Manufacturer="Panasonic Electronic Components", PowerRating=0.15W, Supplier Part Number 1=P2W204TR-ND, TemperatureCoefficient=250ppm/C, Tolerance=25%, Adjustment Type="Top Adjustment", ComponentLink1Description=Datasheet, ComponentLink1URL=http://industrial.panasonic.com/cdbs/www-data/pdf/AOI0000/AOI0000CE1.pdf, ComponentLink2Description="Digi-Key Listing", ComponentLink2URL=https://www.digikey.com/product-detail/en/panasonic-electronic-components/EVM-2WSX80B25/P2W204TR-ND/259730, Number Of Turns=1, PartId=9788, Part Number=EVM-2WSX80B25, Price=0,2394, Supplier 1=Digi-Key
U2: Supplier Part Number 1=LM2940IMP-9.0/NOPBCT-ND, ComponentLink1Description="Manufacturer Link", ComponentLink1URL=http://www.ti.com, ComponentLink2Description=Datasheet, ComponentLink2URL=http://www.ti.com/lit/ds/symlink/lm2940-n.pdf, Iout,max=1A, Part Number=LM2940IMP-9.0/NOPB, Supplier 1=Digi-Key, Vin,max=26V, Vin,min=10V, Vout,nom=9V
U3: library part JSM2512S05, "XP Power J Series JSM25 DC/DC Converter", Supplier Part Number 1=1470-3507-ND, ComponentLink1Description="Manufacturer Link", ComponentLink1URL=https://www.xppower.com/, ComponentLink2Description=Datasheet, ComponentLink2URL=http://www.xppower.com/Portals/0/pdfs/SF_JSM25.pdf, Iout,max=5A, Part Number=JSM2512S05, Supplier 1=Digi-Key, Vin,max=18V, Vin,min=9V, Vout,nom=5V
U4: library part R-78E3.3-1.0, Supplier Part Number 1=945-2409-5-ND, ComponentLink1Description="Manufacturer Link", ComponentLink1URL=https://www.recom-power.com/, ComponentLink2Description=Datasheet, ComponentLink2URL=https://www.recom-power.com/pdf/Innoline/R-78Exx-1.0.pdf, Iout,max=1A, Part Number=R-78E3.3-1.0, Supplier 1=Digi-Key, Vin,max=28V, Vin,min=7V, Vout,nom=3.3V
U1: ComponentLink1Description="Manufacturer Link", ComponentLink1URL=https://www.tindie.com/products/onehorse/ultimate-sensor-fusion-solution/, ComponentLink2Description=Datasheet, ComponentLink2URL=https://github.com/kriswiner/EM7180_SENtral_sensor_hub/wiki, Part Number="Ultimate Sensor Fusion Solution"

## Free pads (board coordinates)
  round 3.2 hole 3.2: 1(-79.731,-30) 1(-79.731,30) 1(-2.731,-85) 1(-2.731,85)
  round 1 hole 1: 1(0,0)

## Via types
v1: diameter 0.8, hole 0.4, Top Layer to Bottom Layer, 35 vias
v2: diameter 1.3, hole 0.9, Top Layer to Bottom Layer, 8 vias

## Nets (pads, with @x,y where several pads share a name; then routed paths per layer and width w, separated by ;. In a path a pad name is that pad's centre, name@x,y a point inside that pad or via, vN(x,y) a via of type N, cw(c..) or ccw(c..) an arc to the next point about the centre after c; other vN are vias at no path point)
3V3: C1.2 C2.2 C6.2 C14.2 IC1.1 IC2.1 J1.P2B J2.P2B J3.P2B J4.P2B J7.1 J11.1 R1.2 R2.2 R3.1 R5.1 R10.2 U1.2 U4.3 | length 155.8
  Top Layer w0.254: -15.94,-5.232 -15.514,-4.806
  Top Layer w0.508: J11.1 -59.537,-16.287 IC1.1 -58.222,-14.972 R3.1 -54.723,-14.972 -50.8,-11.049 v2(-50.8,-2.54) -50.8,3.525 R2.2 R1.2 -55.008,5.528 J7.1 ; IC2.1 -56.399,-8.697 R5.1 -50.899,-8.622 ; R10.2 v1(-54.737,-47.625) ; v1(-18.161,-47.625) -16.764,-47.625 ; -7.669,16.178 C1.2 2.54,16.172 U1.2
  Top Layer w1.016: U4.3 -28.214,-4.806 C14.2 -15.514,-4.806
  Signal Layer 1 w0.508: v1(-54.737,-47.625) v1(-18.161,-47.625)
  Signal Layer 1 w1.016: v2(-50.8,-2.54) U4.3
  Bottom Layer w0.508: J11.1 -62.959,-16.287 C6.2 ; J7.1 -63.056,5.528 C2.2
5V: C5.2 C7.2 J1.P2A J2.P2A J3.P2A J4.P2A J10.1 R4.1 R6.1 R9.2 R12.3 U3.3 | length 125.4
  Top Layer w0.508: R4.1 v2(-56.813,-11.093) ; R6.1 v2(-52.114,-4.743) ; R9.2 v1(-54.737,-42.545) ; C7.2 -23.823,59.87 -17.243,66.45 J4.P2A@-15.94,66.45 ; J3.P2A@-8.44,24.54 -7.21,24.54 -4.475,27.275 R12.3
  Signal Layer 1 w0.508: v1(-54.737,-42.545) v1(-18.161,-42.545)
  Signal Layer 1 w1.016: v2(-52.114,-4.743) -31.325,-4.743 -29.308,-6.76 v2(-18.161,-6.76)
  Bottom Layer w0.508: J10.1 -62.974,-9.032 C5.2 -56.816,-9.522 ; v2(-56.813,-11.093) -56.813,-9.525 -55.753,-9.525 -52.114,-5.886 v2(-52.114,-4.743) ; v1(-18.161,-42.545) -16.764,-42.545
  Bottom Layer w1.016: v2(-18.161,-6.76) -16.412,-6.76
12V: C3.1 C8.2 C9.2 C12.2 J1.P1A J2.P1A J3.P1A J4.P1A L1.1 L2.1 R8.2 R11.1 R13.1 U2.1 U3.6 | length 75.7
  Top Layer w0.508: R8.2 v1(-54.737,-32.385) ; C12.2 -26.125,8.869 R13.1 -21.242,8.869 L2.1 v2(-21.176,10.32)
  Top Layer w1.016: R11.1 L1.1 -23.192,45.201 C9.2 -23.173,42.66 C8.2 -20.979,36.83 U3.6 ; J1.P1A@-22.94,-59.28 -22.94,-75.204 C3.1 -19.604,-78.236 U2.1
  Signal Layer 1 w0.508: v1(-54.737,-32.385) v1(-29.718,-32.385)
  Bottom Layer w0.508: v1(-29.718,-32.385) -28.575,-32.385
GND: C1.1 C2.1 C3.2 C4.2 C5.1 C6.1 C8.1 C9.1 C10.1 C12.1 C13.1 C14.1 D1.2 D2.2 D3.2 D4.2 J1.P1B J2.P1B J3.P1B J4.P1B J7.4 J8.4 J9.2 J10.4 J11.4 R12.1 U1.1 U2.2 U2.4 U3.2 U3.5 U4.2 | length 56.2
  Top Layer w0.254: v1(-5.995,32.919) R12.1
  Top Layer w0.508: v1(-63.754,-47.625) D4.2 ; v1(-63.754,-42.545) D3.2 ; v1(-63.754,-37.465) D1.2 ; v1(-63.754,-32.385) D2.2 ; U1.1 5.334,7.874 C1.1
  Top Layer w1.016: v2(-31.197,7.919) C12.1 ; v2(-30.579,50.137) C10.1 ; U4.2 -22.149,0 C13.1 C14.1 ; v2(-30.48,42.672) -30.474,42.678 C9.1 -25.973,42.66 C8.1 ; C4.2 -11.952,-80.34 U2.2
  Bottom Layer w0.508: J11.4 -62.96,-20.037 C6.1 ; J10.4 -62.944,-12.782 C5.1 ; J7.4 -63.116,1.778 C2.1
  other v1: -13.098,-77.089 -16.908,-74.549 -14.368,-74.549 -11.828,-74.549 -9.288,-74.549 -18.178,-72.009 -15.638,-72.009 -19.448,-69.469 -16.908,-69.469 -14.368,-69.469 -11.828,-69.469 -9.288,-69.469 -20.718,-66.929 -18.178,-66.929 -15.638,-66.929 -13.098,-66.929 -10.558,-66.929
GPIO0: J1.19 J2.19 J3.19 J4.19 J7.2 | length 163.1
  Signal Layer 1 w0.305: J7.2 -63.206,4.278 -52.832,-6.096 -47.95,-6.096 -41.206,-12.84 -41.206,-13.268 -40.588,-13.886 -39.704,-13.886 J2.19
  Bottom Layer w0.254: J1.19 -38.85,-55.54 -38.665,-55.355 -38.665,-20.427 -37.829,-19.591 -37.829,-17.869 -38.621,-17.077 -38.621,-16.079 -38.85,-15.85 J2.19 -38.85,-13.63 -38.665,-13.445 -38.665,21.483 -37.829,22.319 -37.829,24.041 -38.621,24.833 -38.621,25.831 -38.85,26.06 J3.19 -38.85,28.28 -38.665,28.465 -38.665,63.393 -37.829,64.229 -37.829,65.687 -38.85,66.708 J4.19
GPIO1: J1.20 J2.20 J3.20 J4.20 U1.6 | length 163
  Top Layer w0.254: J1.20 -37.59,-19.39 -37.375,-19.175 -37.375,-18.177 -36.559,-17.361 -36.559,-15.929 -37.321,-15.167 -37.321,-14.169 -37.59,-13.9 J2.20 -37.59,22.52 -37.375,22.735 -37.375,23.839 -36.559,24.655 -36.559,25.981 -37.321,26.743 -37.321,27.741 -37.59,28.01 J3.20 -37.59,64.43 -37.375,64.645 -37.375,65.643 -36.559,66.459 -36.559,67.597 -37.59,68.628 J4.20
  Signal Layer 1 w0.305: J2.20 -33.396,-8.636 -6.096,-8.636 U1.6
GPIO2: J1.21 J2.21 J3.21 J4.21 | length 128.3
  Bottom Layer w0.254: J1.21 -36.29,-55.54 -36.105,-55.355 -36.105,-20.427 -35.269,-19.591 -35.269,-17.869 -36.061,-17.077 -36.061,-16.079 -36.29,-15.85 J2.21 -36.29,-13.63 -36.105,-13.445 -36.105,21.483 -35.269,22.319 -35.269,24.041 -36.061,24.833 -36.061,25.831 -36.29,26.06 J3.21 -36.29,28.28 -36.105,28.465 -36.105,63.393 -35.269,64.229 -35.269,65.687 -36.29,66.708 J4.21
GPIO3: J1.22 J2.22 J3.22 J4.22 | length 128.3
  Top Layer w0.254: J1.22 -35.03,-19.39 -34.815,-19.175 -34.815,-17.893 -33.999,-17.077 -33.999,-15.929 -34.761,-15.167 -34.761,-14.169 -35.03,-13.9 J2.22 -35.03,22.52 -34.815,22.735 -34.815,24.017 -33.999,24.833 -33.999,25.981 -34.761,26.743 -34.761,27.741 -35.03,28.01 J3.22 -35.03,64.43 -34.815,64.645 -34.815,65.643 -33.999,66.459 -33.999,67.597 -35.03,68.628 J4.22
GPIO4: J1.23 J2.23 J3.23 J4.23 | length 128.3
  Bottom Layer w0.254: J1.23 -33.73,-55.54 -33.545,-55.355 -33.545,-20.427 -32.709,-19.591 -32.709,-17.869 -33.501,-17.077 -33.501,-16.079 -33.73,-15.85 J2.23 -33.73,-13.63 -33.545,-13.445 -33.545,21.483 -32.709,22.319 -32.709,24.041 -33.501,24.833 -33.501,25.831 -33.73,26.06 J3.23 -33.73,28.28 -33.545,28.465 -33.545,63.393 -32.709,64.229 -32.709,65.687 -33.73,66.708 J4.23
GPIO5: J1.24 J2.24 J3.24 J4.24 | length 128.3
  Top Layer w0.254: J1.24 -32.47,-19.39 -31.439,-18.359 -31.439,-14.909 -32.47,-13.878 J2.24 -32.47,22.52 -31.439,23.551 -31.439,26.979 -32.47,28.01 J3.24 -32.47,64.43 -31.439,65.461 -31.439,67.597 -32.47,68.628 J4.24
NetC4_1: C4.1 J9.1 R7.2 U2.3 | length 99.5
  Top Layer w0.305: R7.2 v1(-54.737,-37.465)
  Top Layer w0.508: C4.1 -9.652,-80.74 U2.3 -5.452,-74.036 J9.1
  Signal Layer 1 w0.305: v1(-54.737,-37.465) -6.477,-37.465 -4.073,-39.869 J9.1
NetC7_1: C7.1 C10.2 L1.2 R11.2 U3.1 | length 13.4
  Top Layer w0.508: R11.2 -23.623,47.283 L1.2 -23.173,47.533 C10.2 ; C7.1 -23.173,52.491 C10.2 ; U3.1 -19.657,50.137 C10.2
NetC13_2: C13.2 L2.2 R13.2 U4.1 | length 16
  Top Layer w0.508: U4.1 -29.872,3.148 C13.2 -21.801,5.277 L2.2 -23.513,5.903 R13.2
NetD1_1: D1.1 R7.1 | length 2.2
  Top Layer w0.508: D1.1 R7.1
NetD2_1: D2.1 R8.1 | length 2.2
  Top Layer w0.508: D2.1 R8.1
NetD3_1: D3.1 R9.1 | length 2.2
  Top Layer w0.508: D3.1 R9.1
NetD4_1: D4.1 R10.1 | length 2.2
  Top Layer w0.508: D4.1 R10.1
NetIC1_2: IC1.2 J10.3 R4.2 | length 8.7
  Top Layer w0.305: J10.3 -60.497,-11.532 R4.2@-60.067,-11.103 ; IC1.2 R4.2@-60.067,-11.103 ; R4.2 R4.2@-60.067,-11.103
NetIC2_2: IC2.2 J10.2 R6.2 | length 9.5
  Top Layer w0.305: J10.2 -62.598,-10.282 IC2.2 -60.063,-4.749 R6.2
NetJ11_2: J11.2 P1.4 | length 10.6
  Top Layer w0.305: J11.2 -62.89,-17.536 -59.979,-20.447 -57.904,-20.447 P1.4
NetJ11_3: J11.3 P1.3 | length 7.6
  Top Layer w0.305: J11.3 -62.354,-18.786 -59.431,-21.709 P1.3
NetP1_5: P1.5 U1.9 | length 69.3
  Signal Layer 1 w0.305: P1.5 -58.277,-24.249 -57.121,-23.093 -11.79,-23.093 2.54,-8.763 U1.9
NetP1_6: P1.6 U1.10 | length 68.6
  Signal Layer 1 w0.305: P1.6 -11.55,-24.249 U1.10
NetR12_2: R12.2 U3.4 | length 16.1
  Top Layer w0.305: R12.2 -1.975,43.745 U3.4
PWM8: J1.13 J2.13 J3.13 J4.13 J8.2 | length 155.8
  Top Layer w0.305: v1(-48.895,-12.319) -48.895,-12.375 J2.13
  Bottom Layer w0.254: -46.55,-3.028 -46.53,-3.048 ; J1.13 -46.53,-20.612 -45.509,-19.591 -45.509,-17.869 -46.53,-16.848 J2.13 -46.53,-3.048 ; J4.13 -46.53,66.708 -45.509,65.687 -45.509,64.229 -46.53,63.208 J3.13 -46.53,25.062 -45.509,24.041 -45.509,22.319 -46.53,21.298 -46.53,-3.048
  Bottom Layer w0.305: J8.2 -52.09,-3.028 -48.895,-6.223 v1(-48.895,-12.319)
PWM9: J1.14 J2.14 J3.14 J4.14 | length 128.4
  Top Layer w0.254: J1.14 -45.27,-19.39 -45.055,-19.175 -45.055,-18.177 -44.239,-17.361 -44.239,-15.929 -45.001,-15.167 -45.001,-14.169 -45.27,-13.9 J2.14 -45.358,-12.742 -45.358,22.432 -45.055,22.735 -45.055,23.733 -44.239,24.549 -44.239,25.981 -45.001,26.743 -45.001,27.741 -45.27,28.01 J3.14 -45.27,64.43 -45.055,64.645 -45.055,65.643 -44.239,66.459 -44.239,67.597 -45.27,68.628 J4.14
Rx1: J1.15 J2.15 J3.15 J4.15 | length 128.3
  Bottom Layer w0.254: J1.15 -43.97,-55.54 -43.785,-55.355 -43.785,-20.427 -42.949,-19.591 -42.949,-17.869 -43.741,-17.077 -43.741,-16.079 -43.97,-15.85 J2.15 -43.97,-13.63 -43.785,-13.445 -43.785,21.483 -42.949,22.319 -42.949,24.041 -43.741,24.833 -43.741,25.831 -43.97,26.06 J3.15 -43.97,28.28 -43.785,28.465 -43.785,63.393 -42.949,64.229 -42.949,65.687 -43.97,66.708 J4.15
Rx2: J1.17 J2.17 J3.17 J4.17 | length 128.3
  Bottom Layer w0.254: J1.17 -41.41,-55.54 -41.225,-55.355 -41.225,-20.427 -40.389,-19.591 -40.389,-17.869 -41.181,-17.077 -41.181,-16.079 -41.41,-15.85 J2.17 -41.41,-13.63 -41.225,-13.445 -41.225,21.483 -40.389,22.319 -40.389,24.041 -41.181,24.833 -41.181,25.831 -41.41,26.06 J3.17 -41.41,28.28 -41.225,28.465 -41.225,63.393 -40.389,64.229 -40.389,65.687 -41.41,66.708 J4.17
SCL1: J1.2 J2.2 J3.2 J4.2 P1.1 R2.1 U1.4 | length 200.5
  Top Layer w0.254: R2.1 -46.315,7.225 -46.301,7.239 ; J1.2 -45.27,-56.452 -46.301,-55.421 -46.301,-19.779 -45.509,-18.987 -45.509,-17.989 -45.27,-17.75 J2.2 -45.27,-15.54 -45.455,-15.355 -45.455,-14.357 -46.301,-13.511 -46.301,7.239 ; J4.2 -45.27,66.07 -45.509,65.831 -45.509,64.833 -46.301,64.041 -46.301,28.399 -45.455,27.553 -45.455,26.555 -45.27,26.37 J3.2 -45.27,24.16 -45.509,23.921 -45.509,22.923 -46.301,22.131 -46.301,7.239
  Top Layer w0.305: P1.1 -56.663,-16.65 J2.2
  Signal Layer 1 w0.305: v1(-49.022,7.239) -46.929,7.239 -42.792,11.377 -10.613,11.377 -5.6,6.364 -3.796,6.364 U1.4
SCL2: IC1.3 J1.4 J2.4 J3.4 J4.4 R3.2 | length 145.6
  Top Layer w0.254: J1.4 -42.71,-56.452 -43.741,-55.421 -43.741,-54.313 -42.905,-53.477 -42.905,-17.945 -42.71,-17.75 J2.4 -42.71,-15.54 -42.895,-15.355 -42.895,-14.357 -43.741,-13.511 -43.741,22.131 -42.949,22.923 -42.949,24.205 -42.71,24.444 J3.4 -42.71,26.37 -42.895,26.555 -42.895,27.553 -43.741,28.399 -43.741,64.041 -42.949,64.833 -42.949,65.831 -42.71,66.07 J4.4
  Top Layer w0.305: IC1.3 -56.403,-13.147 R3.2 -56.314,-13.208 v1(-54.864,-13.208)
  Signal Layer 1 w0.305: v1(-54.864,-13.208) -46.568,-13.208 -45.026,-14.75 -45.026,-15.178 -44.408,-15.796 -43.564,-15.796 J2.4
SDA1: J1.1 J2.1 J3.1 J4.1 P1.2 R1.1 U1.5 | length 192.5
  Top Layer w0.254: R1.1 -53.925,8.255 v1(-47.879,8.255)
  Top Layer w0.305: P1.2 -56.033,-18.56 J2.1
  Signal Layer 1 w0.305: v1(-47.879,8.255) -46.857,9.277 -45.605,9.277 -43.001,11.881 -9.341,11.881 U1.5
  Bottom Layer w0.254: J1.1 -46.54,-58.702 -47.561,-57.681 -47.561,-21.001 -46.54,-19.98 J2.1 -46.54,-17.48 -47.878,-16.142 -47.878,-13.549 -47.86,-13.531 -47.86,-12.885 -47.878,-12.867 -47.878,20.592 -46.54,21.93 J3.1 -46.54,24.43 -47.561,25.451 -47.561,62.819 -46.54,63.84 J4.1
SDA2: IC2.3 J1.3 J2.3 J3.3 J4.3 R5.2 | length 144
  Top Layer w0.305: IC2.3 -56.399,-6.797 R5.2 v1(-54.878,-6.872)
  Signal Layer 1 w0.305: v1(-54.878,-6.872) -48.373,-6.872 v1(-44.577,-10.668)
  Bottom Layer w0.254: J1.3 -43.98,-58.392 -45.001,-57.371 -45.001,-55.929 -44.239,-55.167 -44.239,-54.313 -44.424,-54.128 -44.424,-20.424 -43.98,-19.98 J2.3 -43.98,-17.48 -44.195,-17.265 -44.195,-16.267 -45.001,-15.461 -45.001,-14.019 -44.239,-13.257 -44.239,-12.403 -44.424,-12.218 -44.424,21.486 -43.98,21.93 J3.3 -43.98,24.43 -44.195,24.645 -44.195,25.643 -45.001,26.449 -45.001,27.891 -44.239,28.653 -44.239,29.507 -44.424,29.692 -44.424,63.396 -43.98,63.84 J4.3
THR0: J1.5 J2.5 J3.5 J4.5 J5.1 | length 154.2
  Signal Layer 1 w0.305: J5.1 -44.729,20.041 J3.5
  Bottom Layer w0.254: J1.5 -41.42,-58.392 -42.441,-57.371 -42.441,-55.929 -41.679,-55.167 -41.679,-54.313 -41.864,-54.128 -41.864,-20.424 -41.42,-19.98 J2.5 -41.42,-17.48 -41.635,-17.265 -41.635,-16.267 -42.441,-15.461 -42.441,-14.019 -41.679,-13.257 -41.679,-12.403 -41.864,-12.218 -41.864,21.486 -41.42,21.93 J3.5 -41.42,24.43 -41.635,24.645 -41.635,25.643 -42.441,26.449 -42.441,27.891 -41.679,28.653 -41.679,29.507 -41.864,29.692 -41.864,63.396 -41.42,63.84 J4.5
THR1: J1.6 J2.6 J3.6 J4.6 J5.2 | length 157.6
  Top Layer w0.254: J1.6 -40.15,-56.452 -41.181,-55.421 -41.181,-19.779 -40.389,-18.987 -40.389,-17.989 -40.15,-17.75 J2.6 -40.15,-15.54 -40.335,-15.355 -40.335,-14.357 -41.181,-13.511 -41.181,22.131 -40.389,22.923 -40.389,23.921 -40.15,24.16 J3.6 -40.15,26.37 -40.335,26.555 -40.335,27.553 -41.181,28.399 -41.181,64.041 -40.389,64.833 -40.389,65.831 -40.15,66.07 J4.6
  Signal Layer 1 w0.305: J5.2 -44.485,18.791 -40.15,23.126 J3.6
THR2: J1.7 J2.7 J3.7 J4.7 J5.3 | length 157.8
  Signal Layer 1 w0.305: J5.3 -44.669,17.541 J3.7
  Bottom Layer w0.254: J1.7 -38.86,-58.392 -39.881,-57.371 -39.881,-55.929 -39.119,-55.167 -39.119,-54.313 -39.304,-54.128 -39.304,-20.424 -38.86,-19.98 J2.7 -38.86,-17.48 -39.075,-17.265 -39.075,-16.267 -39.881,-15.461 -39.881,-14.019 -39.119,-13.257 -39.119,-12.403 -39.304,-12.218 -39.304,21.486 -38.86,21.93 J3.7 -38.86,24.43 -39.075,24.645 -39.075,25.643 -39.881,26.449 -39.881,27.891 -39.119,28.653 -39.119,29.507 -39.304,29.692 -39.304,63.396 -38.86,63.84 J4.7
THR3: J1.8 J2.8 J3.8 J4.8 J5.4 | length 161.2
  Top Layer w0.254: J1.8 -37.59,-56.452 -38.621,-55.421 -38.621,-19.779 -37.829,-18.987 -37.829,-17.989 -37.59,-17.75 J2.8 -37.59,-15.54 -37.775,-15.355 -37.775,-14.357 -38.621,-13.511 -38.621,22.131 -37.829,22.923 -37.829,24.027 -37.59,24.266 J3.8 -37.59,26.37 -37.775,26.555 -37.775,27.553 -38.621,28.399 -38.621,64.041 -37.829,64.833 -37.829,65.831 -37.59,66.07 J4.8
  Signal Layer 1 w0.305: J5.4 -44.425,16.291 -37.59,23.126 J3.8
THR4: J1.9 J2.9 J3.9 J4.9 J6.1 | length 162.3
  Signal Layer 1 w0.305: J6.1 -46.863,12.787 J3.9
  Bottom Layer w0.254: J1.9 -36.3,-58.392 -37.321,-57.371 -37.321,-55.929 -36.559,-55.167 -36.559,-54.313 -36.744,-54.128 -36.744,-20.424 -36.3,-19.98 J2.9 -36.3,-17.48 -36.515,-17.265 -36.515,-16.267 -37.321,-15.461 -37.321,-14.019 -36.559,-13.257 -36.559,-12.403 -36.744,-12.218 -36.744,21.486 -36.3,21.93 J3.9 -36.3,24.43 -36.515,24.645 -36.515,25.643 -37.321,26.449 -37.321,27.891 -36.559,28.653 -36.559,29.507 -36.744,29.692 -36.744,63.396 -36.3,63.84 J4.9
THR5: J1.10 J2.10 J3.10 J4.10 J6.2 | length 165.7
  Top Layer w0.254: J1.10 -35.03,-56.452 -36.061,-55.421 -36.061,-19.779 -35.269,-18.987 -35.269,-17.705 -35.03,-17.466 J2.10 -35.03,-15.54 -35.215,-15.355 -35.215,-14.357 -36.061,-13.511 -36.061,22.131 -35.269,22.923 -35.269,24.205 -35.03,24.444 J3.10 -35.03,26.37 -35.215,26.555 -35.215,27.553 -36.061,28.399 -36.061,64.041 -35.269,64.833 -35.269,65.831 -35.03,66.07 J4.10
  Signal Layer 1 w0.305: J6.2 -46.619,11.537 -35.03,23.126 J3.10
THR6: J1.11 J2.11 J3.11 J4.11 J6.3 | length 165.9
  Signal Layer 1 w0.305: J6.3 -46.803,10.287 J3.11
  Bottom Layer w0.254: J1.11 -33.74,-58.392 -34.761,-57.371 -34.761,-55.929 -33.999,-55.167 -33.999,-54.313 -34.184,-54.128 -34.184,-20.424 -33.74,-19.98 J2.11 -33.74,-17.48 -33.955,-17.265 -33.955,-16.267 -34.761,-15.461 -34.761,-14.019 -33.999,-13.257 -33.999,-12.403 -34.184,-12.218 -34.184,21.486 -33.74,21.93 J3.11 -33.74,24.43 -33.955,24.645 -33.955,25.643 -34.761,26.449 -34.761,27.891 -33.999,28.653 -33.999,29.507 -34.184,29.692 -34.184,63.396 -33.74,63.84 J4.11
THR7: J1.12 J2.12 J3.12 J4.12 J6.4 | length 169.3
  Top Layer w0.254: J1.12 -32.47,-56.452 -33.501,-55.421 -33.501,-19.779 -32.47,-18.748 J2.12 -32.47,-14.52 -33.501,-13.489 -33.501,22.131 -32.47,23.162 J3.12 -32.47,27.368 -33.501,28.399 -33.501,64.041 -32.47,65.072 J4.12
  Signal Layer 1 w0.305: J6.4 -48.693,9.037 -47.948,9.782 -45.814,9.782 -32.47,23.126 J3.12
Tx1: J1.16 J2.16 J3.16 J4.16 | length 128.7
  Top Layer w0.254: J1.16 -41.933,-53.963 -41.933,-20.109 -42.451,-19.591 -42.451,-18.133 -41.679,-17.361 -41.679,-15.929 -42.441,-15.167 -42.441,-14.169 -42.71,-13.9 J2.16 -42.71,22.52 -42.495,22.735 -42.495,24.017 -41.679,24.833 -41.679,25.981 -42.441,26.743 -42.441,27.741 -42.71,28.01 J3.16 -42.71,64.43 -42.495,64.645 -42.495,65.643 -41.679,66.459 -41.679,67.597 -42.71,68.628 J4.16
Tx2: J1.18 J2.18 J3.18 J4.18 | length 128.3
  Top Layer w0.254: J1.18 -40.15,-19.39 -39.935,-19.175 -39.935,-18.177 -39.119,-17.361 -39.119,-15.935 -39.116,-15.932 -39.881,-15.167 -39.881,-14.169 -40.15,-13.9 J2.18 -40.15,22.52 -39.935,22.735 -39.935,23.733 -39.119,24.549 -39.119,25.981 -39.881,26.743 -39.881,27.741 -40.15,28.01 J3.18 -40.15,64.43 -39.935,64.645 -39.935,65.643 -39.119,66.459 -39.119,67.597 -40.15,68.628 J4.18
pads on no net: J7.3 J8.1 J8.3 U1.3 U1.7 U1.8

## Polygon pours and split planes (outlines as drawn)
5V on Bottom Layer "Bottom Layer - 5V - 2" (solid, pour order 8): -17.018,59.69 3.81,59.69 3.81,54.61 -17.018,54.61
12V on Bottom Layer "Bottom Layer - 12V" (solid, pour order 6): -28.956,66.802 -19.304,66.802 -19.304,-59.69 -28.956,-59.69
5V on Bottom Layer "Bottom Layer - 5V" (solid, pour order 2): -17.018,66.802 -7.366,66.802 -7.366,-59.69 -17.018,-59.69
GND on Top Layer "Bottom Layer - GND - LDO" (solid, remove dead copper, pour order 10): -22.86,-78.867 -8.001,-78.867 -8.001,-63.754 -22.86,-63.754
3V3 on Top Layer "Top Layer - 3V3" (solid, pour order 0): -17.018,70.194 -7.366,70.194 -7.366,-56.261 -17.018,-56.261
GND on Internal Plane 1 (split plane): 177 vertices, not listed, extent -83.843,-88.482 7.478,88.482

## Keep-outs
Keep-Out Layer:
  the board outline again, w0.1

## Silkscreen, mask and mechanical layers (free items; w line width, h text height)
Top Overlay:
  text "12V" at -68.58,-33.02 h1.52
  text "9V" at -67.31,-38.1 h1.52
  text "5V" at -67.31,-43.18 h1.52
  text "3V3" at -68.58,-48.26 h1.52
Mechanical 1:
  lines w0.2: -61.999,-63.754 8.001,-63.754 ; -61.999,63.754 8.001,63.754

## Text inside footprints (layer, text, board x,y; h text height)
P1: Top Overlay "6" at -57.15,-25.773 h1.27 r270; Top Overlay "5" at -59.69,-25.773 h1.27 r270; Top Overlay "2" at -57.15,-16.629 h1.27 r270; Top Overlay "1" at -59.69,-17.137 h1.27 r270
U1: Top Overlay "INT" at -5.715,-10.16 h1.52 r270; Top Overlay "I04" at -3.175,-10.16 h1.52 r270; Top Overlay "I01" at -0.635,-10.16 h1.52 r270; Top Overlay "SCM" at 1.905,-10.16 h1.52 r270; Top Overlay "SDM" at 4.445,-10.16 h1.52 r270; Top Overlay "SDA" at -5.715,13.97 h1.52 r270; Top Overlay "SCL" at -3.175,13.97 h1.52 r270; Top Overlay "I02" at -0.635,13.97 h1.52 r270; Top Overlay "3V3" at 1.905,13.97 h1.52 r270; Top Overlay "GND" at 4.445,13.97 h1.52 r270